# Altium PCB bhl.PcbDoc
Units mm, origin at the board's own origin, x right, y up, seen from the top; angles counter-clockwise.
Board outline 29.34 x 29.71 mm, 2 copper layers (Top Layer, Bottom Layer); 49 components, 27 nets, 113 pads, 18 vias.
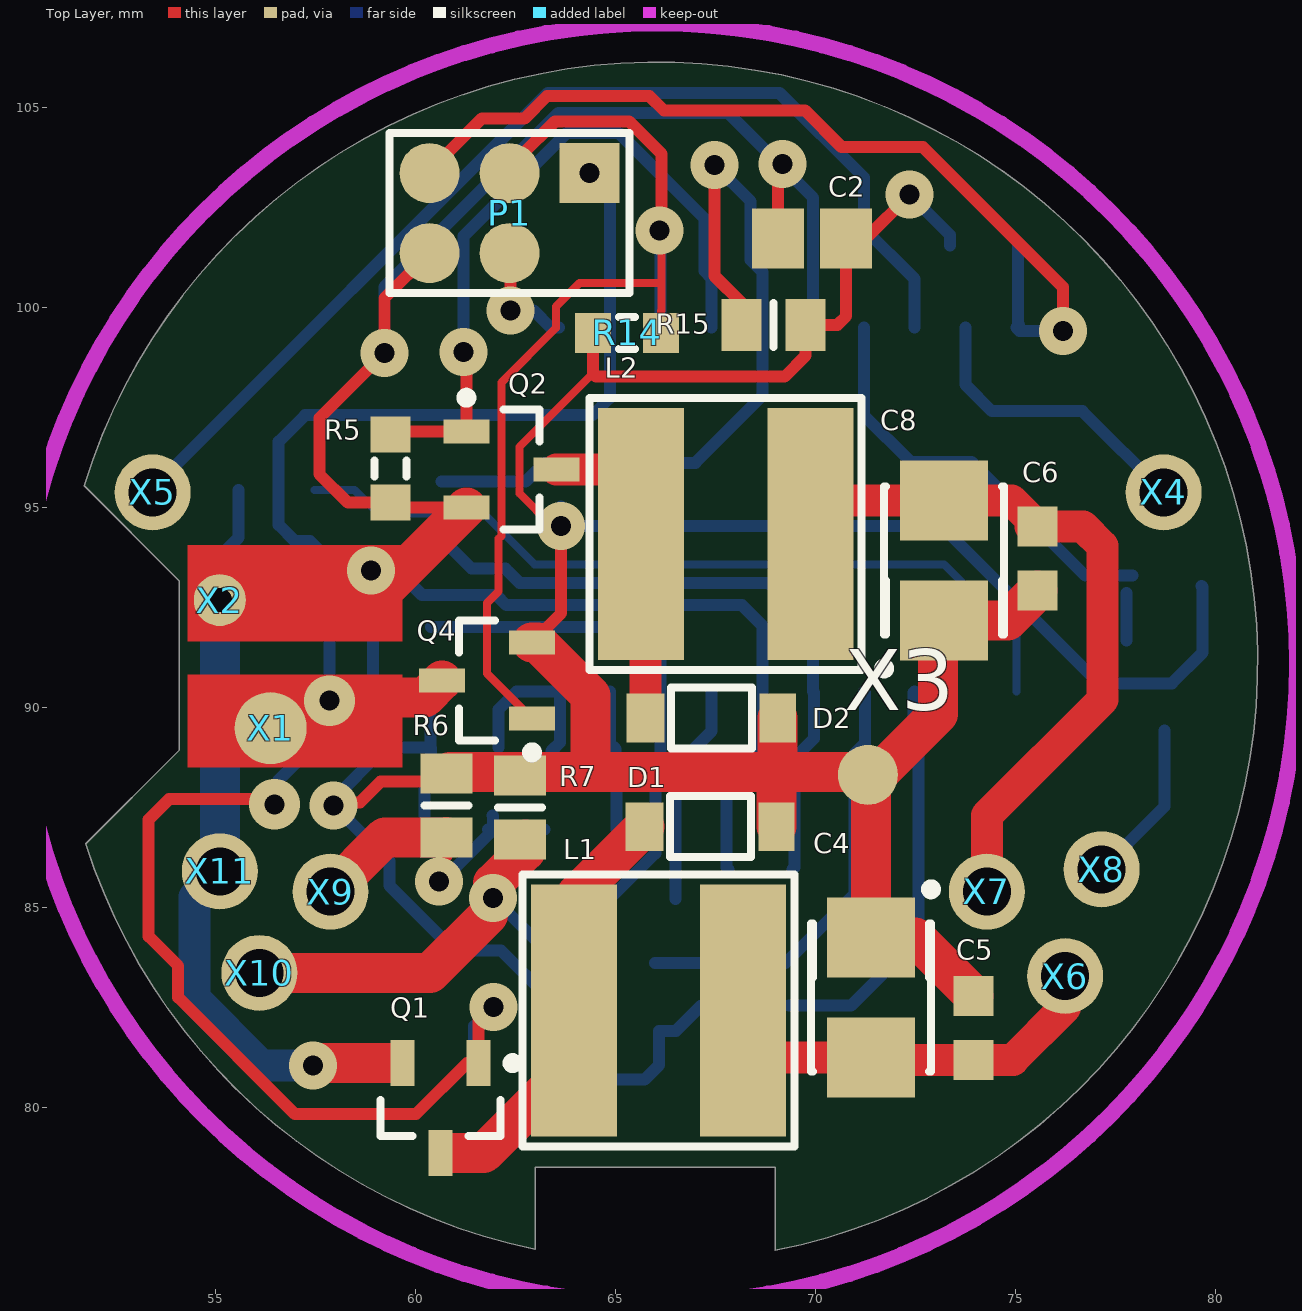
[diagram p0: Top Layer view]
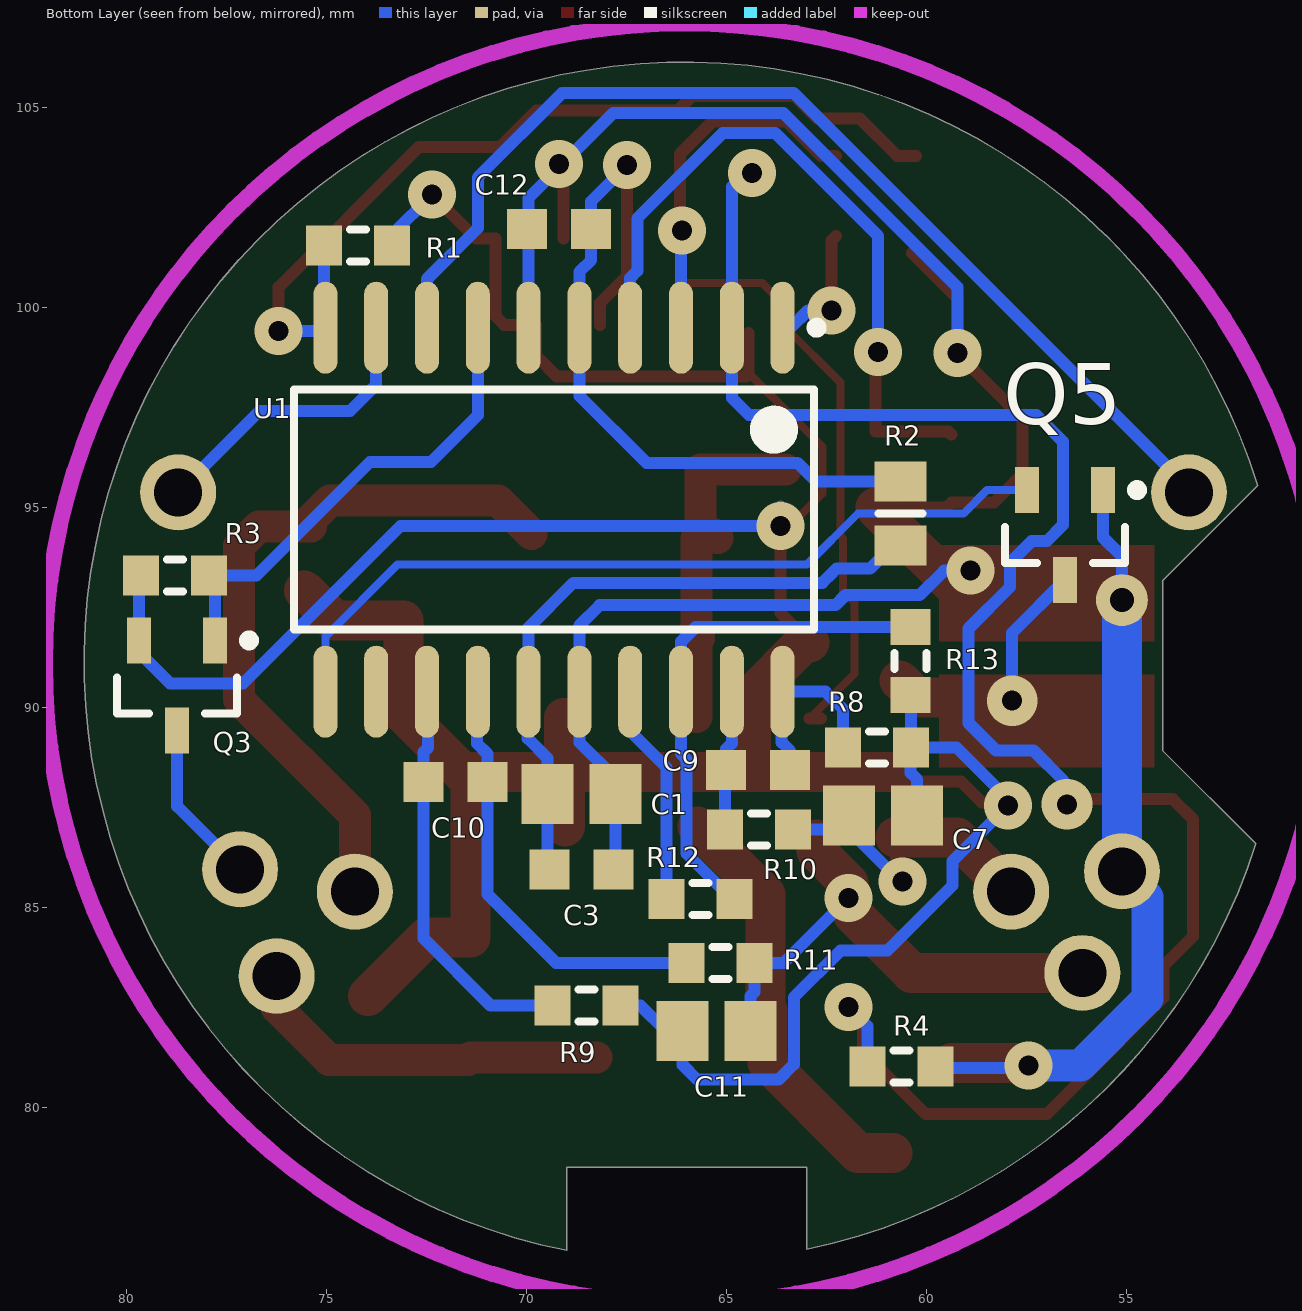
[diagram p1: Bottom Layer view, seen from below]

## Layer stack, top to bottom
Top Solder: solder mask 0.0102, Solder Resist, Dk 3.5
Top Layer: signal copper 0.0356
Dielectric1: dielectric 0.32, FR-4, Dk 4.8
Bottom Layer: signal copper 0.0356
Bottom Solder: solder mask 0.0102, Solder Resist, Dk 3.5

## Board outline
63,76.452 cw(c66.065,91.135) 51.77,86.591 51.768,86.593 54.102,88.926 54.102,93.167 51.727,95.542 cw(c66.065,91.135) 69.001,76.425 69,76.429 69,78.511 63,78.511

## Design rules (kind name [scope] priority, off if disabled: settings)
Clearance [All] p1: gap=0.2
ComponentClearance [All] p1: gap=0.2 collisioncheckmode=3 verticalgap=0.2 showdistances=FALSE
FabricationTestPointUsage TestPointUsage [All] p1: valid=0 allowmultiple=FALSE
FabricationTestpoint Testpoint [All] p1: side=3 testpointundercomponent=TRUE minsize=1.016 maxsize=2.54 preferedsize=1.524 minholesize=0 maxholesize=1.016 preferedholesize=0.813 testpointgrid=0.025 allowsidetop=TRUE allowsidebottom=TRUE usegrid=TRUE gridtolerance=0
PolygonConnect [All] p1: connectstyle=Relief reliefconductorwidth=0.254 reliefentries=4 polygonreliefangle="90 Angle" airgapwidth=0.254
RoutingVias [All] p1: holewidth=0.6 width=1 viastyle="Through Hole" minholewidth=0 minwidth=0 maxholewidth=0.711 maxwidth=1.6
SilkToSolderMaskClearance SilkscreenOverComponentPads [IsPad] p1: minsilkscreentomaskgap=0.254 clearancetoexposedcopper=TRUE
SolderMaskExpansion [All] p1: expansion=0.102
Width [All] p1: maxlimit=2 minlimit=0.2 preferedwidth=0.5
26 further rules are at their usual default settings.

## Components (designator, comment, footprint, x,y, rotation, side; value= is the part's Value field where it differs from the comment)
C1 "C0805" CAPC2012N 68.631,87.833 r0 bottom
C2 "GRM21BR71A106KE51L" CAPC2012N 69.926,101.727 r0 top
C3 "C0603" CAPC1608N 68.631,85.954 r0 bottom
C4 "T491B" B 71.399,82.753 r270 top
C5 "C0603" CAPC1608N 73.965,81.991 r90 top
C6 "C0603" CAPC1608N 75.565,93.726 r270 top
C7 "C0805" CAPC2012N 61.087,87.3 r0 bottom
C8 "T491B" B 73.228,93.675 r90 top
C9 "C0603" CAPC1608N 64.211,88.443 r180 bottom
C10 "C0603" CAPC1608N 71.78,88.138 r0 bottom
C11 "C0805" CAPC2012N 65.253,81.915 r180 bottom
C12 "C0603" CAPC1608N 69.19,101.956 r180 bottom
D1 "MBR0520" DIODE 67.386,87.02 r0 top
D2 "MBR0520" DIODE 67.412,89.738 r0 top
L1 "CDRH5D28RHPNP-470MC" SMDPI 66.091,82.423 r0 top
L2 "CDRH5D28RHPNP-470MC" SMDPI 67.767,94.336 r0 top
P1 "Header 3X2" HDR2X3 64.364,103.861 r180 top
Q1 "IRLML2502" SOT-23_N 60.638,79.985 r270 top
Q2 "IRLML2502" SOT-23_N 62.408,95.944 r0 top
Q3 "BSS84" SOT-23_N 78.74,90.551 r270 bottom
Q4 "IRLML6402" SOT-23_N 61.798,90.678 r180 top
Q5 "BSS84" SOT-23_N 56.54,94.31 r270 bottom
R1 "R0603" RESC1608N 74.219,101.549 r0 bottom
R2 "R_SMD_0805" RESC2012L 60.655,94.844 r270 bottom
R3 "R0603" RESC1608N 78.791,93.294 r180 bottom
R4 "R0603" RESC1608N 60.63,81.026 r0 bottom
R5 "R0603" RESC1608N 59.385,95.969 r90 top
R6 "R_SMD_0805" RESC2012L 60.782,87.554 r90 top
R7 "R_SMD_0805" RESC2012L 62.628,87.503 r90 top
R8 "R0603" RESC1608N 61.239,89.002 r180 bottom
R9 "R0603" RESC1608N 68.504,82.55 r180 bottom
R10 "R0603" RESC1608N 64.186,86.944 r180 bottom
R11 "R0603" RESC1608N 65.151,83.617 r0 bottom
R12 "R0603" RESC1608N 65.659,85.217 r0 bottom
R13 "R0603" RESC1608N 60.401,91.161 r270 bottom
R14 "R0603" RESC1608N 65.303,99.365 r0 top
R15 "R_SMD_0805" RESC2012L 68.961,99.568 r180 top
U1 "ATtiny26L-8SI" 20S_N 69.317,94.945 r270 bottom
X1 "DOT_1.5" PAD_2X0.4#1 56.388,89.484 r0 top
X2 "DOT_1.5" PAD_2X0.4#2 55.118,92.685 r0 top
X3 "TP" TP 71.323,88.316 r0 top
X4 "DOT_1.5" PAD_2X0.4#3 78.715,95.377 r0 top
X5 "DOT_1.5" PAD_2X0.4#3 53.442,95.377 r0 top
X6 "DOT_1.5" PAD_2X0.4#3 76.251,83.287 r0 top
X7 "DOT_1.5" PAD_2X0.4#3 74.295,85.395 r0 top
X8 "DOT_1.5" PAD_2X0.4#3 77.165,85.954 r0 top
X9 "DOT_1.5" PAD_2X0.4#3 57.887,85.395 r270 top
X10 "DOT_1.5" PAD_2X0.4#3 56.109,83.363 r90 top
X11 "DOT_1.5" PAD_2X0.4#3 55.118,85.903 r0 top

## Footprints (in the part's own frame and the unit in brackets; to place one, negate y for a bottom-side part, rotate by r counter-clockwise, add the part's x,y. Pads: shape width x height; smd on the part's side, far side on the other; paste and mask are expansions set on the pad)
20S_N [mm] "SOIC, 20-Leads, Body 12.8x7.5mm, Pitch 1.27mm, IPC Medium Density"
  oval 2.3x0.6 smd: 1(-4.55,5.715) 2(-4.55,4.445) 3(-4.55,3.175) 4(-4.55,1.905) 5(-4.55,0.635) 6(-4.55,-0.635) 7(-4.55,-1.905) 8(-4.55,-3.175) 9(-4.55,-4.445) 10(-4.55,-5.715) 11(4.55,-5.715) 12(4.55,-4.445) 13(4.55,-3.175) 14(4.55,-1.905) 15(4.55,-0.635) 16(4.55,0.635) 17(4.55,1.905) 18(4.55,3.175) 19(4.55,4.445) 20(4.55,5.715)
  silkscreen extent -4.67,-6.5 3,6.69, body extent -3.75,-6.5 3.75,6.5, height 2.65
B [mm] "Capacitor, SM Tantalum; Body 3.5 x 2.8 mm (LxW typ)"
  rect 2x2.2 smd: 1(-1.5,0) 2(1.5,0)
  silkscreen extent -2.82,-1.5 1.85,1.63
CAPC1608N [mm] "Chip Capacitor, Body 1.6x0.8mm, IPC Medium Density"
  rect 1x1 smd: 1(-0.8,0) 2(0.8,0)
  body extent -0.87,-0.48 0.87,0.48, height 0.85
CAPC2012N [mm] "Chip Capacitor, Body 2.0x1.3mm, IPC Medium Density"
  rect 1.3x1.5 smd: 1(-0.85,0) 2(0.85,0)
  body extent -1.1,-0.72 1.1,0.72, height 1.1
DIODE [mm] "SMD_Power_Inductor"
  rect 0.95x1.22 smd: 1(-1.651,0)
  rect 0.91x1.22 smd: 2(1.651,0)
  silkscreen extent -1.02,-0.76 1.02,0.76
HDR2X3 [mm] "Connector; Header; 3x2 Position"
  rect 1.5x1.5 smd: 1(0,0.5)
  round 1.5 smd: 3(2,0.5) 4(2,2.5) 5(4,0.5) 6(4,2.5)
  silkscreen extent -1,-0.5 5,3.5
PAD_2X0.4#1 [mm]
  round 1.8 smd: 1(0,0)
  body extent -0.92,-0.92 0.92,0.92
PAD_2X0.4#2 [mm]
  round 1.3 hole 0.6: 1(0,0)
  body extent -0.92,-0.92 0.92,0.92
PAD_2X0.4#3 [mm]
  round 1.9 hole 1.2: 1(0,0)
  body extent -0.92,-0.92 0.92,0.92
RESC1608N [mm] "Chip Resistor, Body 1.6x0.8mm, IPC Medium Density"
  rect 0.9x1 smd: 1(-0.85,0) 2(0.85,0)
  silkscreen extent -0.2,-0.4 0.2,0.4, body extent -0.85,-0.48 0.85,0.48, height 0.6
RESC2012L [mm] "Chip Resistor, Body 2.0x1.3mm, IPC High Density"
  rect 1x1.3 smd: 1(-0.8,0) 2(0.8,0)
  silkscreen extent 0,-0.55 0,0.55, body extent -1.07,-0.7 1.07,0.7, height 0.65
SMDPI [mm] "SMD_Power_Inductor"
  rect 2.15x6.3 smd: 1(-2.113,0) 2(2.113,0)
  silkscreen extent -3.4,-3.4 3.4,3.4
SOT-23_N [mm] "SOT23, 3-Leads, Body 2.9x1.3mm, Pitch 0.95mm, Lead Span 2.3mm, IPC Medium Density"
  rect 1.15x0.6 smd: 1(-1.125,0.95) 2(-1.125,-0.95) 3(1.125,0)
  silkscreen extent -1.25,-1.5 0.7,1.93, body extent -0.7,-1.5 0.7,1.5, height 1.11
TP [mm] "TP"
  round 1.5 smd: 1(0,0)

## Part data
C1 C7 C11: "Ceramic Chip Capacitor - Standard"
C2: library part C0805, "Ceramic Chip Capacitor - Standard"
C3 C5 C6 C9 C10 C12: "Конденсатор"
C4 C8: "Solid Tantalum Chip Capacitor, Standard T491 Series - Industrial Grade"
D1 D2: "Schottky Rectifier"
L1 L2: library part L, "Дроссель высокочастотный"
P1: "Header, 3-Pin, Dual row"
Q1 Q2: library part IRLML2402, "HEXFET Power MOSFET"
Q3 Q4 Q5: library part IRLML6302, "HEXFET Power MOSFET"
R1 R2 R3 R4 R5 R6 R7 R8 R9 R10 R11 R12 R13 R14 R15: "Резистор"
U1: "8-Bit AVR Microcontroller with 2K Bytes of Flash Memory"
X1 X2 X4 X5 X6 X7 X8 X9 X10 X11: "Разем"
X3: "Test Point"

## Via types
v1: diameter 1.2, hole 0.5, Top Layer to Bottom Layer, 16 vias
v2: diameter 1.27, hole 0.5, Top Layer to Bottom Layer, 2 vias

## Nets (pads, with @x,y where several pads share a name; then routed paths per layer and width w, separated by ;. In a path a pad name is that pad's centre, name@x,y a point inside that pad or via, vN(x,y) a via of type N, cw(c..) or ccw(c..) an arc to the next point about the centre after c; other vN are vias at no path point)
BTN1: U1.9 X4.1 | length 7.5
  Bottom Layer w0.3: U1.9 73.762,98.069 74.422,97.409 76.683,97.409 X4.1
BTN2: U1.8 X5.1 | length 27.2
  Bottom Layer w0.3: X5.1@53.467,95.301 53.467,95.504 63.324,105.361 69.112,105.361 71.222,103.251 71.222,101.981 72.492,100.711 U1.8
CURR1+: C9.2 R8.1 U1.20 | length 4.7
  Bottom Layer w0.3: R8.1 62.089,89.953 62.531,90.395 U1.20 63.627,90.37 63.627,89.129 63.411,88.913 C9.2
CURR1-: C9.1 R10.1 U1.19 | length 3.5
  Bottom Layer w0.3: U1.19 64.872,89.103 65.011,88.964 C9.1 65.036,88.418 R10.1
CURR2+: C10.2 R9.1 U1.13 | length 10.1
  Bottom Layer w0.3: R9.1 70.904,82.55 72.58,84.226 C10.2 72.58,88.881 72.466,88.995 72.466,90.37 U1.13
CURR2-: C10.1 R11.2 U1.14 | length 10.9
  Bottom Layer w0.3: R11.2 69.266,83.617 70.98,85.331 C10.1 70.98,88.837 71.247,89.103 71.247,90.37 U1.14
GND: C1.1 C2.1 C3.1 C12.1 P1.6 Q1.2 Q2.2 Q5.1 R4.1 R5.1 U1.6 U1.16 X2.1 X11.1 | length 74.2
  Top Layer w0.3: v1@57.404,81.051 v1@57.462,81.11 ; v1@58.885,98.857 v1(59.233,98.857) ; P1.6 59.233,100.23 v1(59.233,98.857) ; Q2.2 59.511,94.994 R5.1 58.322,95.119 57.607,95.834 57.607,97.231 v1(59.233,98.857) ; C2.1 69.076,103.468 v1(69.19,103.581)
  Top Layer w1: v1@57.404,81.051 v1(57.455,81.051) ; v1@57.462,81.11 59.385,81.11 ; v1@58.445,93.294 58.903,93.294 58.903,92.614 Q2.2
  Bottom Layer w0.3: X2.1 55.118,93.777 55.59,94.249 Q5.1 ; v1(57.455,81.051) 57.52,80.986 R4.1@59.78,80.986 ; v1(58.903,93.421) 59.563,93.421 60.174,92.811 62.028,92.811 62.281,92.558 68.174,92.558 68.682,92.05 U1.16 68.682,89.129 67.781,88.228 C1.1 67.781,86.004 C3.1 ; v1(59.233,98.857) 59.233,100.512 63.582,104.861 67.834,104.861 69.952,102.743 U1.6
  Bottom Layer w0.8: X11.1 54.483,85.268 54.483,82.726 56.157,81.051 v1(57.455,81.051)
  Bottom Layer w1: X11.1@54.864,85.903 X11.1@55.118,86.157 ; X11.1 X11.1@55.118,86.157 ; X2.1 X11.1@55.118,86.157
LED1: C4.2 C5.1 L1.2 X6.1 | length 9.4
  Top Layer w0.8: L1.2@68.25,81.253 C4.2 71.461,81.191 C5.1 74.943,81.191 76.251,82.499 X6.1
LED2: C6.1 C8.2 L2.2 X7.1 | length 18.1
  Top Layer w0.8: L2.2 70.72,95.175 C8.2 74.916,95.175 C6.1 ; X7.1 74.295,87.3 77.191,90.195 77.191,94.031 76.695,94.526 C6.1@75.387,94.526
NetC1_2: C1.2 C3.2 R2.2 U1.15 | length 16.3
  Bottom Layer w0.3: R2.2@60.808,94.082 61.417,93.472 62.255,93.472 62.339,93.389 62.339,93.387 62.61,93.116 68.834,93.116 69.952,91.999 U1.15 69.977,90.37 69.977,89.23 69.481,88.734 C1.2 69.481,86.004 C3.2
NetC7_2: C7.2 R6.1 R10.2 X9.1 | length 9.6
  Top Layer w0.3: X9.1@57.861,85.42 X9.1 ; v1@60.249,85.369 60.249,85.75 60.782,86.284 R6.1
  Top Layer w1: X9.1@58.255,85.395 X9.1 59.246,86.754 R6.1 R6.1@60.77,86.766
  Bottom Layer w0.3: v1@60.249,85.369 60.376,85.369 C7.2@61.951,86.944 ; C7.2@61.824,86.944 C7.2@61.951,86.944 ; C7.2 61.951,87.286 C7.2@61.951,86.944 ; R10.2@63.234,86.944 C7.2@61.951,86.944
  other v1: 60.604,85.649
NetC11_2: C11.2 R7.1 R11.1 X10.1 | length 12.9
  Top Layer w1: X10.1 60.376,83.363 v1@61.824,84.811 ; v1(61.951,85.242) 61.951,85.611 62.755,86.416 R7.1@62.755,86.703
  Bottom Layer w0.3: v1(61.951,85.242) 63.576,83.617 R11.1 64.301,82.892 64.403,82.79 C11.2
NetC12_2: C12.2 R2.1 R15.2 U1.5 | length 19.4
  Top Layer w0.3: v1(67.488,103.556) 67.488,100.787 68.161,100.114 R15.2
  Bottom Layer w0.3: R2.1 62.76,95.644 63.23,96.114 67.005,96.114 68.682,97.79 U1.5 68.682,100.889 68.39,101.181 C12.2 68.39,102.654 v1(67.488,103.556)
NetD1_1: D1.1 L1.1 Q1.3 | length 10.7
  Top Layer w1: Q1.3@60.858,78.86 61.713,78.86 63.978,81.125 L1.1 64.033,82.479 64.033,85.319 D1.1
NetD2_1: D2.1 L2.1 Q2.3 | length 8.6
  Top Layer w0.8: Q2.3 65.654,95.944 L2.1 65.761,94.229 L2.1@65.761,91.669 ; L2.1@65.227,94.239 L2.1@65.324,94.336 ; L2.1@65.692,91.737 L2.1@65.761,91.669 ; D2.1@65.761,89.764 L2.1@65.761,91.669
NetP1_3: P1.3 Q4.1 R14.2 U1.3 | length 26.3
  Top Layer w0.2: Q4.1 61.798,90.853 61.798,92.608 62.089,92.9 62.089,94.22 62.158,94.289 62.158,98.124 63.525,99.492 63.525,100.025 64.11,100.609 66.167,100.609 ; R14.2 66.153,99.91 66.167,99.924 66.167,100.609 ; v1@66.167,101.93 66.167,100.609
  Top Layer w0.3: P1.3@62.262,103.792 62.644,103.792 63.5,104.648 65.354,104.648 66.167,103.835 66.167,101.93 v1@66.396,101.702 ; Q4.1@62.647,89.728 Q4.1
  Bottom Layer w0.3: U1.3 66.142,101.448 v1@66.396,101.702
  other v1: 66.116,101.93
NetP1_4: P1.4 U1.1 | length 3.5
  Top Layer w0.3: P1.4@62.262,101.792 62.382,101.672 v1(62.382,99.924) v1@62.281,100.025
  Bottom Layer w0.3: v1(62.382,99.924) 62.967,99.924 63.395,99.495 U1.1
NetP1_5: P1.5 R1.2 U1.10 | length 23
  Top Layer w0.3: P1.5@60.262,103.792 60.739,103.792 61.671,104.724 62.738,104.724 63.297,105.283 65.862,105.283 66.218,104.927 69.748,104.927 70.663,104.013 72.695,104.013 76.2,100.508 v1(76.2,99.416)
  Bottom Layer w0.3: R1.2 U1.10@75.069,99.532 ; U1.10@75.104,99.568 U1.10@75.069,99.532 ; v1(76.2,99.416) 75.111,99.416 U1.10@75.069,99.458 ; U1.10@75.069,99.458 U1.10 U1.10@75.069,99.532 ; U1.10@75.069,99.458 U1.10@75.069,99.532
NetQ3_1: Q3.1 R3.2 U1.7 | length 11.8
  Bottom Layer w0.3: U1.7 71.222,97.307 72.39,96.139 73.914,96.139 76.759,93.294 R3.2 ; Q3.1 R3.2@77.79,92.864
NetQ4_3: Q4.3 Q5.3 X1.1 | length 6.6
  Top Layer w1: v2(57.861,90.17) 57.937,90.246 60.241,90.246 Q4.3
  Bottom Layer w0.3: Q5.3 57.861,91.864 v2(57.861,90.17)
NetQ5_2: Q5.2 U1.11 | length 20.4
  Bottom Layer w0.2: Q5.2 58.489,95.435 59.08,94.844 61.722,94.844 62.992,93.574 73.228,93.574 75.032,91.77 U1.11
NetR12_1: R12.1 R13.1 U1.18 | length 12.9
  Bottom Layer w0.3: R13.1 65.774,92.011 66.142,91.643 U1.18 66.142,88.845 66.009,88.713 66.009,86.354 64.872,85.217 R12.1
NetR12_2: R12.2 U1.17 | length 5.6
  Bottom Layer w0.3: R12.2 66.509,88.505 67.412,89.408 U1.17
PWM1: P1.1 Q1.1 R4.2 U1.2 | length 46.3
  Top Layer w0.3: v2(56.49,87.579) 56.49,87.706 53.848,87.706 53.34,87.198 53.34,84.277 54.077,83.541 54.077,82.753 56.998,79.832 60.02,79.832 61.298,81.11 Q1.1 61.588,82.419 v1@61.959,82.79
  Bottom Layer w0.3: v2@56.587,88.184 57.328,88.925 58.268,88.925 58.953,89.611 58.953,91.973 57.912,93.015 57.912,93.624 57.379,94.158 56.998,94.158 56.591,94.564 56.591,96.647 57.252,97.307 64.44,97.307 64.872,97.739 U1.2 64.872,103.022 ; R4.2 61.48,82.032 v1(61.959,82.51) ; v1@61.959,82.79 v1@61.996,82.753
  other v1: 64.364,103.361
PWM2: Q2.1 R5.2 U1.4 | length 17.6
  Top Layer w0.3: R5.2 59.46,96.894 Q2.1 61.283,98.737 61.214,98.806 v1(61.214,98.882)
  Bottom Layer w0.3: v1(61.214,98.882) 61.214,101.786 63.789,104.361 65.1,104.361 67.234,102.227 67.234,100.914 67.412,100.736 U1.4
REDLED: Q3.3 X8.1 | length 4.1
  Bottom Layer w0.3: X8.1 78.74,87.528 Q3.3
VCC: C2.2 C4.1 C5.2 C6.2 C7.1 C8.1 C11.1 D1.2 D2.2 Q3.2 Q4.2 R1.1 R3.1 R6.2 R7.2 R8.2 R9.2 R13.2 R14.1 R15.1 X3.1 | length 99.2
  Top Layer w0.2: v1@63.424,94.539 62.608,95.355 62.608,96.517 64.453,98.362
  Top Layer w0.3: v1@57.887,87.63 58.623,87.63 59.137,88.144 60.623,88.144 R6.2@60.871,88.392 ; Q4.2 63.652,92.357 v1(63.652,94.539) ; v1@63.424,94.539 v1(63.652,94.539) ; v1@63.652,94.666 v1(63.652,94.539) ; 64.453,98.337 64.518,98.273 69.24,98.273 69.761,98.793 R15.1 70.561,99.568 70.776,99.783 C2.2 71.272,101.727 v1(72.365,102.819) ; 64.453,98.362 R14.1
  Top Layer w1: R6.2@60.871,88.392 64.389,88.392 ; Q4.2 63.058,91.628 64.389,90.297 64.389,88.392 ; D1.2 69.037,88.392 ; D2.2 69.063,88.494 68.961,88.392 ; X3.1@71.399,88.113 C4.1 72.503,84.253 C5.2 ; C8.1@73.076,92.175 73.076,89.84 71.603,88.367 71.577,88.392 68.961,88.392 ; C8.1 74.814,92.175 C6.2 ; 64.389,88.392 68.961,88.392
  Bottom Layer w0.3: v1@57.887,87.376 v1@57.887,87.63 ; C7.1 60.237,88.202 60.401,88.367 60.401,88.99 R8.2 ; R13.2 60.389,90.299 R8.2 ; v1@63.652,95.021 v1(63.652,94.539) 73.152,94.539 77.089,90.602 78.918,90.602 79.69,91.374 Q3.2 79.69,93.016 R3.1@79.666,93.04 ; R9.2 67.158,82.55 66.523,81.915 C11.1 66.103,81.063 65.735,80.696 63.703,80.696 63.322,81.077 63.322,82.753 62.154,83.922 60.985,83.922 59.36,85.547 59.36,86.157 v1@57.887,87.63 ; v1(72.365,102.819) 73.369,101.815 R1.1 ; v1@57.887,87.63 59.258,89.002 R8.2
  other v1: 57.963,87.554
pads on no net: U1.12

## Keep-outs
Keep-Out Layer:
  circle w0.4: c66.047,91.1 r16

## Other copper
Top Layer:
  rectangle net GND: 54.305,91.643 59.69,94.056
  rectangle net NetQ4_3: 54.305,88.494 59.69,90.83

## Silkscreen, mask and mechanical layers (free items; w line width, h text height)
Top Solder:
  rectangle: 54.305,88.494 59.69,91.034
  rectangle: 54.305,91.237 59.69,94.056
Mechanical 1:
  circle w0.1: c78.667,95.35 r1.35
  circle w0.1: c53.422,95.367 r1.35
  circle w0.4: c75.797,84.85 r3
  lines w0.4: 58.696,84.93 ccw(c56.297,84.85) 58.697,84.85
Mechanical 3:
  lines w0.1: 51.768,86.593 54.102,88.926 54.102,93.167 51.727,95.542 cw(c66.065,91.135) 69.001,76.425 ; 51.77,86.591 ccw(c66.065,91.135) 63,76.452 ; 63,76.454 63,78.511 69,78.511 69,76.429
Mechanical 5:
  circle w0.1: c79.527,95.656 r0.999
  circle w0.1: c55.106,85.9 r1.008
  circle w0.1: c56.109,83.364 r1.008
  circle w0.1: c57.889,85.371 r1.008
  circle w0.1: c76.231,83.275 r1.008
  circle w0.1: c74.281,85.375 r1.008
  circle w0.1: c77.156,85.95 r0.999